# Altium PCB PCB_2023-02-18.pcbdoc
Units mil, origin at the board's own origin, x right, y up, seen from the top; angles counter-clockwise.
Board outline 3583.23 x 3028.62 mil, 2 copper layers (Top Layer, Bottom Layer); 15 components, 32 nets, 41 pads, 37 vias.
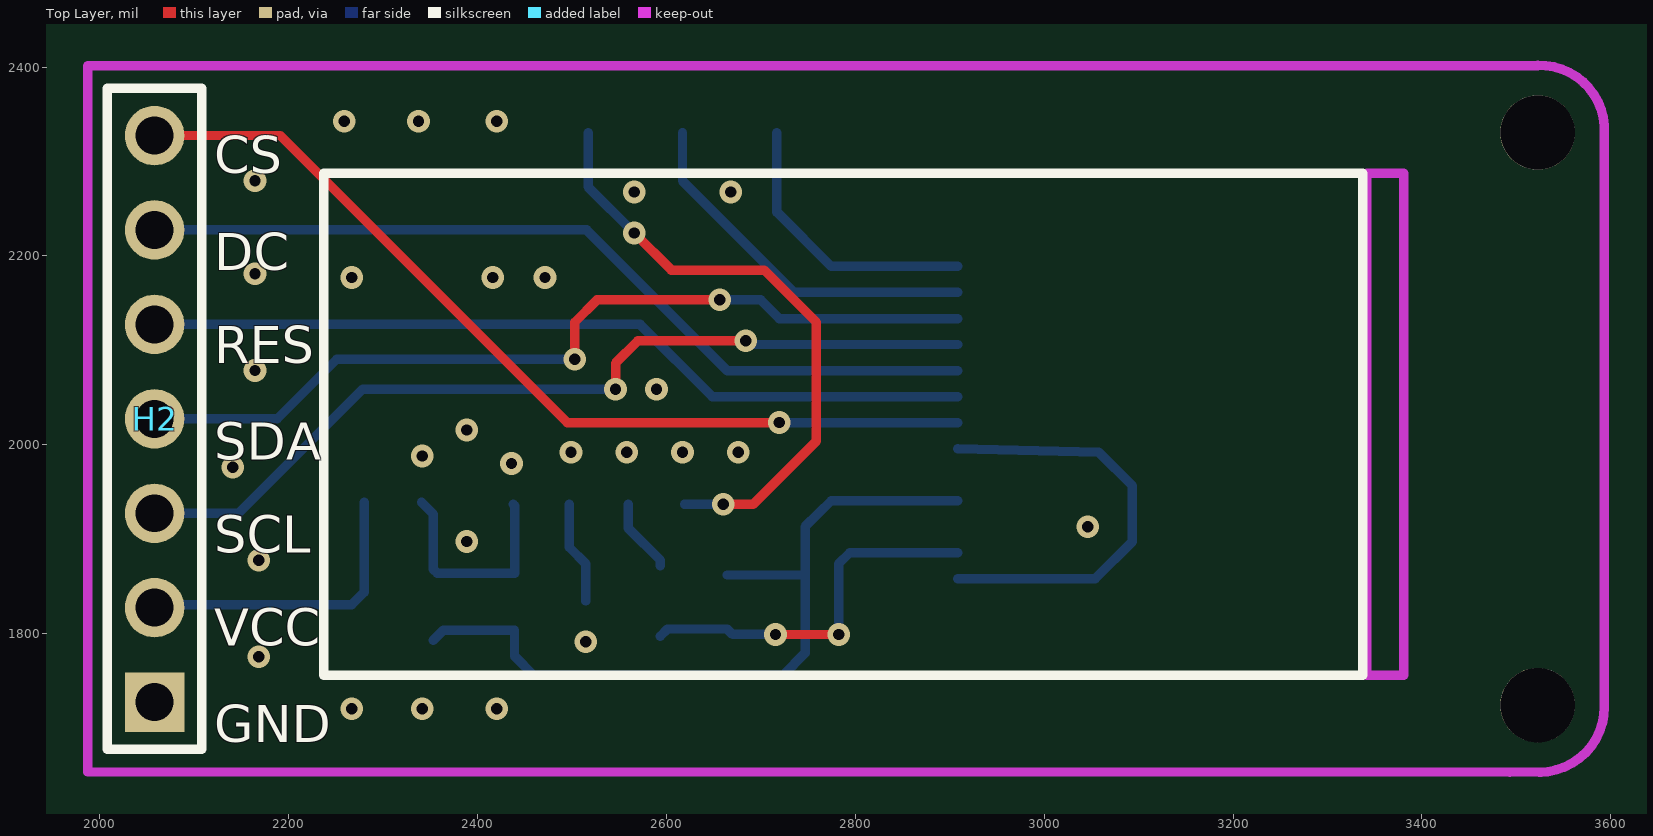
[diagram p0: Top Layer view]
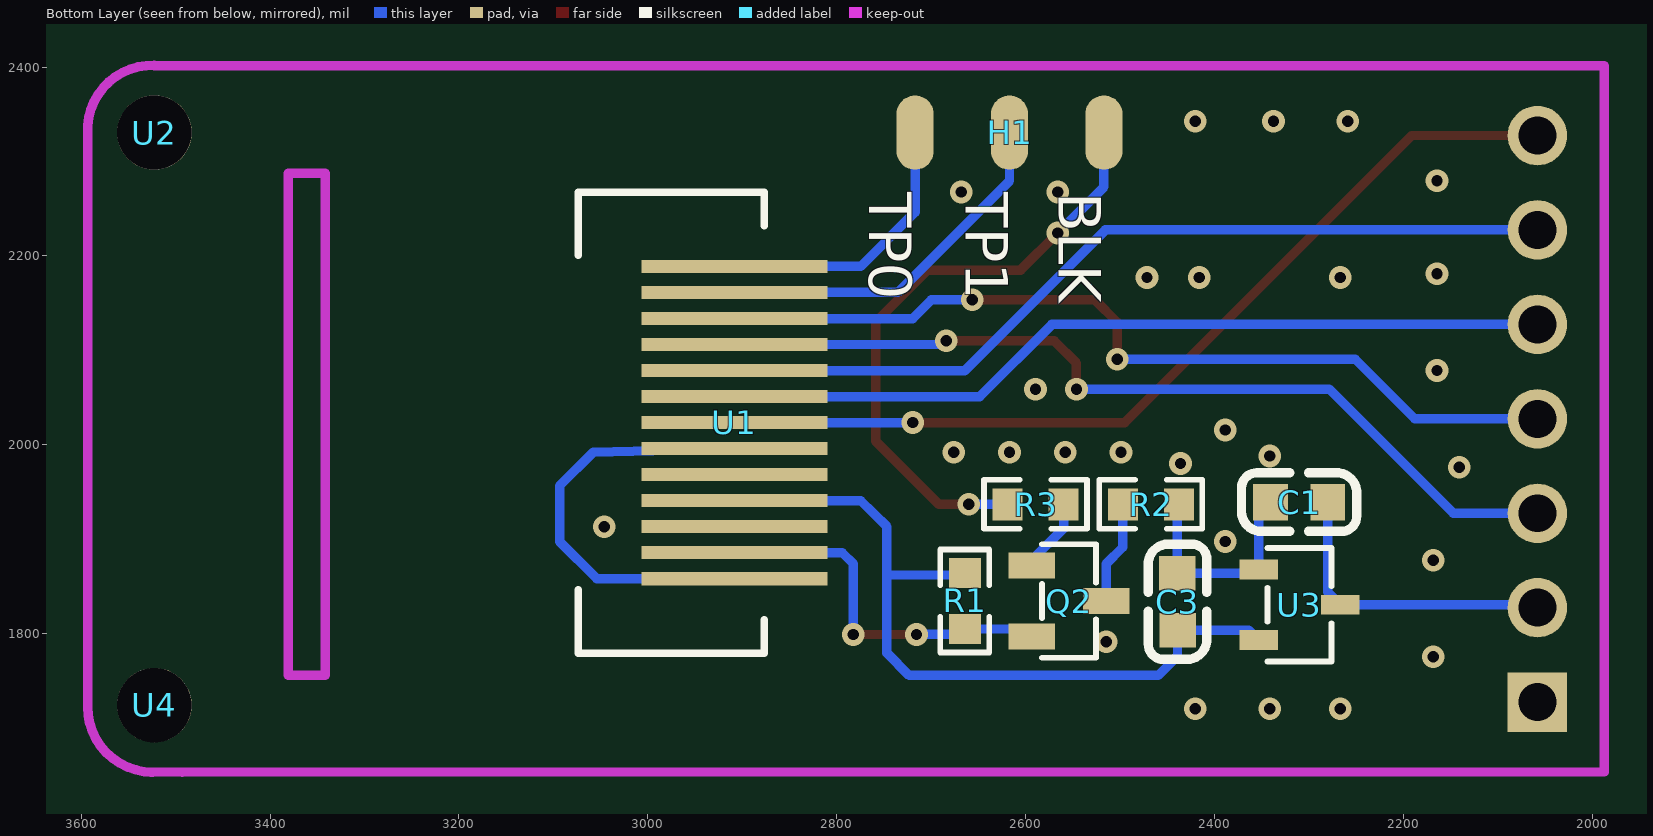
[diagram p1: Bottom Layer view, seen from below]

## Layer stack, top to bottom
Top Layer: signal copper (thickness not stored)
Dielectric: dielectric 12.6, FR-4, Dk 4.8
Bottom Layer: signal copper (thickness not stored)

## Board outline
4583.23,1000 1000,1000 1000,4028.62 4583.23,4028.62

## Components (designator, comment, footprint, x,y, rotation, side; value= is the part's Value field where it differs from the comment)
C1 "1uF" 0603_C_JX 2310.24,1939.37 r0 bottom
C3 "1uF" 0603_C_JX 2438.99,1833.86 r90 bottom
H1 "HDR-F-2.54_1x3" 0.96引脚 2616.94,2330.71 r270 bottom
H2 "排针2.54-7P" SIP-2.54MM-7P-CJT-H8.54 2057.88,2027.56 r270 top
Q2 "S8550-H" SOT-23-3_L2.9-W1.3-P1.90-LS2.4-BR 2553.95,1834.65 r180 bottom
R1 "180" R0603 2664.22,1834.67 r270 bottom
R2 "1k" R0603 2467.33,1937.01 r180 bottom
R3 "1k" R0603 2589.38,1937.01 r180 bottom
U1 "ips 0.96 TFT" IPS0.96TFT 2908.26,2023.58 r0 bottom
U2 "M2螺柱孔_MK" M2螺柱孔_MK 3522.45,2330.71 r0 bottom
U3 "XC6206P332MR_C347376" SOT-23-3_L3.0-W1.7-P0.95-LS2.9-BR 2309.85,1830.71 r180 bottom
U4 "M2螺柱孔_MK" M2螺柱孔_MK 3522.45,1724.41 r0 bottom
? "" ? 3095.27,2427.12 r0 top
? "" ? 2790.17,2598.53 r0 top
? "" ? 1744.51,2027.56 r0 top

## Footprints (in the part's own frame and the unit in brackets; to place one, negate y for a bottom-side part, rotate by r counter-clockwise, add the part's x,y. Pads: shape width x height; smd on the part's side, far side on the other; paste and mask are expansions set on the pad)
0.96引脚 [mm]
  oval 2x1 smd: 1(0,-2.54) 2(0,0) 3(0,2.54)
0603_C_JX [mil]
  rect 36.61x38.58 smd: 1(30.31,0.21) 2(-30.38,0.01)
  silkscreen extent -61,-31 61,31
IPS0.96TFT [mm]
  rect 5x0.35 smd: 1(0,-4.2) 2(0,-3.5) 3(0,-2.8) 4(0,-2.1) 5(0,-1.4) 6(0,-0.7) 7(0,0) 8(0,0.7) 9(0,1.4) 10(0,2.1) 11(0,2.8) 12(0,3.5) 13(0,4.2)
  silkscreen extent -0.8,-6.2 4.2,6.2
M2螺柱孔_MK [mm]
  round 2 hole 2 unplated: ""(0,0)
R0603 [mil]
  rect 31.75x34.02 smd: 1(29.65,0) 2(-29.65,0)
  silkscreen extent -55,-26 55,26
SIP-2.54MM-7P-CJT-H8.54 [mm]
  rect 1.6x1.6 hole 1.02: 1(7.62,0)
  round 1.6 hole 1.02: 2(5.08,0) 3(2.54,0) 4(0,0) 5(-2.54,0) 6(-5.08,0) 7(-7.62,0)
  silkscreen extent -8.89,-1.27 8.89,1.27
SOT-23-3_L2.9-W1.3-P1.90-LS2.4-BR [mm]
  rect 1.25x0.7 smd: 1(-1,0.95) 2(-1,-0.95) 3(1,0)
  silkscreen extent -0.73,-1.53 0.73,1.53
SOT-23-3_L3.0-W1.7-P0.95-LS2.9-BR [mm]
  rect 1.037x0.532 smd: 1(-1.101,0.95) 2(-1.101,-0.95) 3(1.101,0)
  silkscreen extent -0.86,-1.53 0.86,1.53
? [mil]

## Via types
v1: diameter 24, hole 12, Top Layer to Bottom Layer, tented both sides, 37 vias

## Nets (pads, with @x,y where several pads share a name; then routed paths per layer and width w, separated by ;. In a path a pad name is that pad's centre, name@x,y a point inside that pad or via, vN(x,y) a via of type N, cw(c..) or ccw(c..) an arc to the next point about the centre after c; other vN are vias at no path point)
+5V: C1.2 H2.2 U3.3 | length 324.1
  Bottom Layer w10: H2.2 2061.03,1830.7 U3.3 2279.87,1844.09 C1.2
BL: H1.3 R3.2 | length 651.9
  Top Layer w10: v1(2565.76,2224.41) 2605.12,2185.04 2703.55,2185.04 2758.67,2129.92 2758.67,2003.94 2691.74,1937.01 v1(2660.25,1937.01)
  Bottom Layer w10: H1.3 2516.93,2273.23 v1(2565.76,2224.41) ; R3.2 v1(2660.25,1937.01)
CS: H2.7 U1.7 | length 976.3
  Top Layer w10: H2.7 2190.91,2327.58 2494.87,2023.62 v1(2719.3,2023.62)
  Bottom Layer w10: v1(2719.3,2023.62) U1.7
GND: C1.1 C3.1 H2.1 R2.1 U1.8 U1.11 U1.13 U3.1 | length 697.6
  Bottom Layer w10: C1.1 2353.21,1926.51 U3.1 2357.15,1864.17 C3.1 2439.19,1935.49 R2.1 ; U1.13@2908.22,1858.28 3053.92,1858.28 3093.32,1897.67 3093.32,1956.67 3057.92,1992.08 U1.8@2908.22,1996.08
  other v1: 2266.55,1720.47 2341.35,1720.47 2420.09,1720.47 2168.12,1775.59 2514.58,1791.34 2168.12,1877.95 2388.6,1897.63 3046.08,1913.38 2140.56,1976.38 2435.84,1980.32 2341.35,1988.18 2498.83,1992.12 2557.89,1992.12 2616.94,1992.12 2676,1992.12 2388.6,2015.74 2589.38,2059.05 2164.19,2078.74 2266.55,2177.16 2416.15,2177.16 2471.27,2177.16 2164.19,2181.11 2565.76,2267.72 2668.12,2267.72 2164.19,2279.53 2258.67,2342.51 2337.41,2342.51 2420.09,2342.51
LEDA: Q2.2 R1.1 U1.12 | length 400.2
  Top Layer w10: v1(2715.37,1799.21) v1(2782.3,1799.21)
  Bottom Layer w10: Q2.2@2593.32,1797.26 2601.05,1804.99 R1.1 2669.96,1799.21 v1(2715.37,1799.21) ; v1(2782.3,1799.21) 2782.3,1874.02 2794.05,1885.77 U1.12@2908.22,1885.77
R2_2: Q2.3 R2.2 | length 109.6
  Bottom Layer w10: R2.2 2497.02,1891.58 2514.62,1873.97 Q2.3@2514.62,1834.67
R3_1: Q2.1 R3.1 | length 78.8
  Bottom Layer w10: R3.1 2559.72,1911.58 2593.32,1877.97 Q2.1@2593.32,1872.08
RES: H2.5 U1.6 | length 881.9
  Bottom Layer w10: H2.5 2572.02,2127.57 2648.42,2051.18 U1.6@2908.22,2051.18
RS: H2.6 U1.5 | length 912
  Bottom Layer w10: H2.6 2515.32,2227.57 2664.22,2078.68 U1.5@2908.22,2078.68
S$35: 
S$43: 
S$80: 
S$82: 
S$84: 
S$86: 
S$103: 
S$105: 
S$117: 
S$120: 
S$1371: 
S$1381: 
S$1384: 
S$1850: 
S$1852: 
S$1859: 
S$1861: 
S$2676: 
SCL: H2.3 U1.4 | length 943.8
  Top Layer w10: v1(2546.08,2059.05) 2546.08,2086.62 2569.69,2110.24 v1(2683.87,2110.24)
  Bottom Layer w10: H2.3 2146.87,1927.57 2278.36,2059.05 v1(2546.08,2059.05) ; v1(2683.87,2110.24) 2687.85,2106.26 U1.4
SDA: H2.4 U1.3 | length 933.7
  Top Layer w10: v1(2502.77,2090.55) 2502.77,2129.92 2526.39,2153.55 v1(2656.31,2153.55)
  Bottom Layer w10: H2.4 2187.82,2027.58 2250.82,2090.57 v1@2502.72,2090.57 ; v1@2656.32,2153.57 2699.62,2153.57 2719.32,2133.78 U1.3@2908.22,2133.78
TP0: H1.1 U1.1 | length 299.3
  Bottom Layer w10: H1.1 2716.92,2246.47 2774.42,2188.97 U1.1@2908.22,2188.97
TP1: H1.2 U1.2 | length 391.4
  Bottom Layer w10: H1.2 2616.92,2279.57 2735.12,2161.38 U1.2@2908.22,2161.38
VCC: C3.2 R1.2 U1.10 U3.2 | length 832.4
  Bottom Layer w10: U3.2 2363.39,1803.48 C3.2 2439.02,1776.38 2459.42,1755.88 2723.22,1755.88 2746.82,1779.58 2746.82,1913.38 2774.42,1940.88 U1.10@2908.22,1940.88 ; R1.2@2664.22,1862.17 2746.82,1862.47
pads on no net: U1.9 U2. U4.

## Polygon pours and split planes (outlines as drawn)
GND on Bottom Layer (solid): 1857.1,2377.95 1857.1,2519.68 1994.89,2519.68 3550.01,2519.68 3675.99,2519.68 3770.48,2519.68 3770.48,2425.2 3770.48,1696.85 3770.48,1574.8 3648.43,1574.8 1987.02,1574.8 1857.1,1574.8 1857.1,1704.72 1857.1,2377.95
GND on Top Layer (solid): 1794.1,2362.2 1794.1,2574.8 2006.7,2574.8 3664.18,2574.8 3853.16,2574.8 3853.16,2385.83 3853.16,1665.35 3853.16,1500 3687.8,1500 1983.08,1500 1794.1,1500 1794.1,1688.98 1794.1,2362.2

## Keep-outs
Keep-Out Layer:
  lines w10 net S$1371: 3522.52,2401.86 cw(c3524.84,2333.52) 3593.11,2329.5
  lines w10 net S$1381: 3524.08,1653.38 ccw(c3524.08,1722.44) 3593.14,1722.44

## Silkscreen, mask and mechanical layers (free items; w line width, h text height)
Top Overlay:
  lines w10 net S$103: 2236.84,1755.95 2236.84,2287.45 ; 3337.41,1755.9 3337.41,2287.4
  lines w10 net S$105: 2236.87,2287.41 3337.26,2287.41 ; 2236.99,1755.95 3337.38,1755.95
  text "CS" at 2120.88,2287.4 h39.37
  text "DC" at 2120.88,2185.04 h39.37
  text "RES" at 2120.88,2086.61 h39.37
  text "SDA" at 2120.88,1984.25 h39.37
  text "SCL" at 2120.88,1885.83 h39.37
  text "VCC" at 2120.88,1787.4 h39.37
  text "GND" at 2120.88,1685.04 h39.37
Bottom Overlay:
  text "BLK" at 2564.64,2267.72 h45 r90
  text "TP1" at 2663.06,2267.72 h45 r90
  text "TP0" at 2765.43,2267.72 h45 r90
Document:
  lines w10 net S$103: 1920.09,2992.13 1920.09,3523.62 ; 3020.62,2992.05 3020.62,3351.15 3020.62,3523.55
  lines w10 net S$105: 1920.11,3523.58 3020.5,3523.58 ; 1920.24,2992.12 3020.63,2992.12
  lines w10 net S$117: 3646.19,3013.97 3646.19,3502.16
  lines w10 net S$120: 3020.76,3502.24 3645.96,3502.24 ; 3020.99,3013.58 3646.19,3013.58
  lines w10 net S$2676: 3679.93,1633.86 3640.56,1669.29 ; 3924.03,1582.68 3640.56,1669.29 ; 3640.56,1669.29 3699.61,1677.16 3640.56,1669.29
  text "屏幕实际大小参考" at 2168.12,3236.22 h80
  text "M2孔" at 3963.4,1555.12 h80 r3